# EAGLE board schematic-pcb (EAGLE 9.7.0)
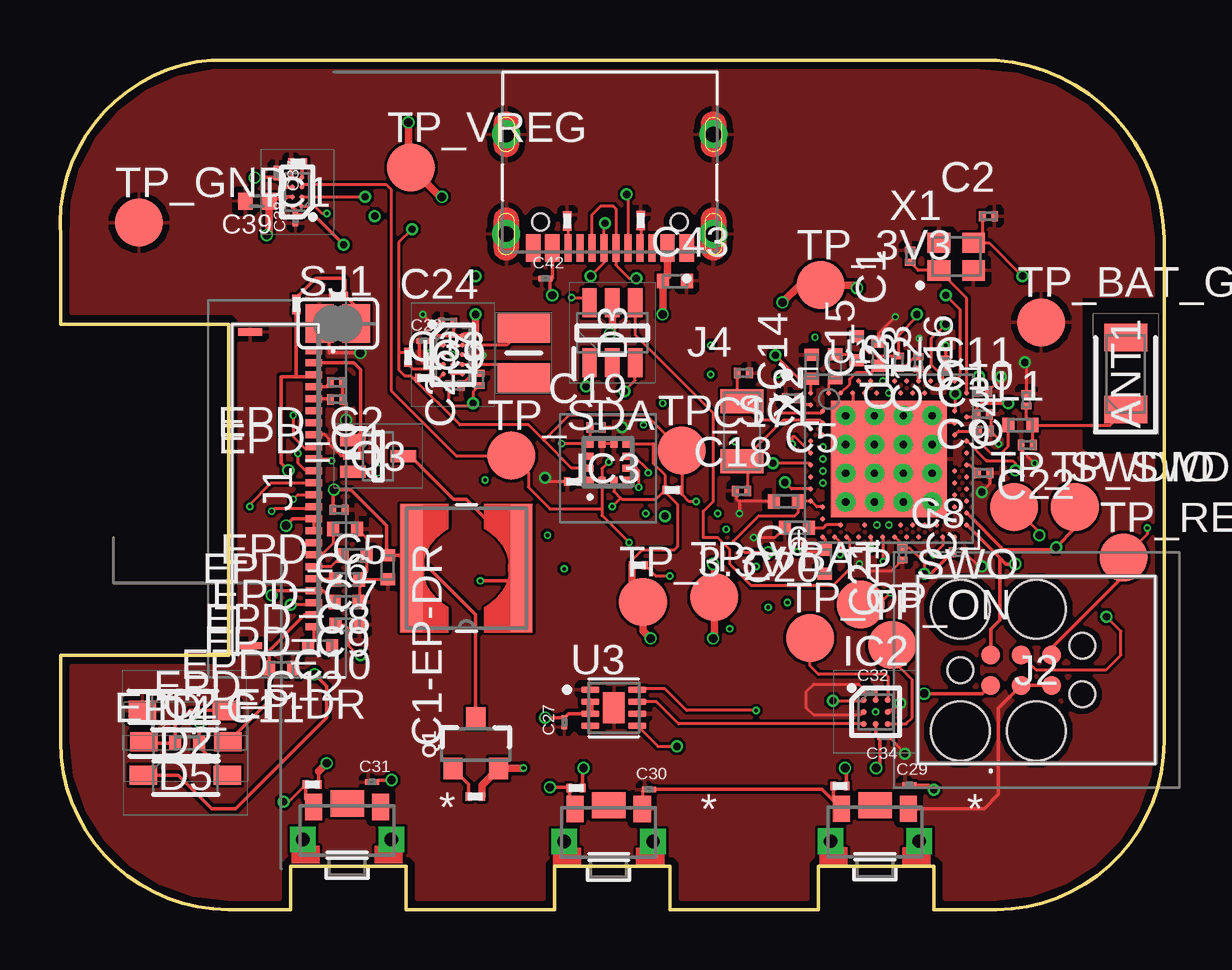
[diagram p0: board, top side]
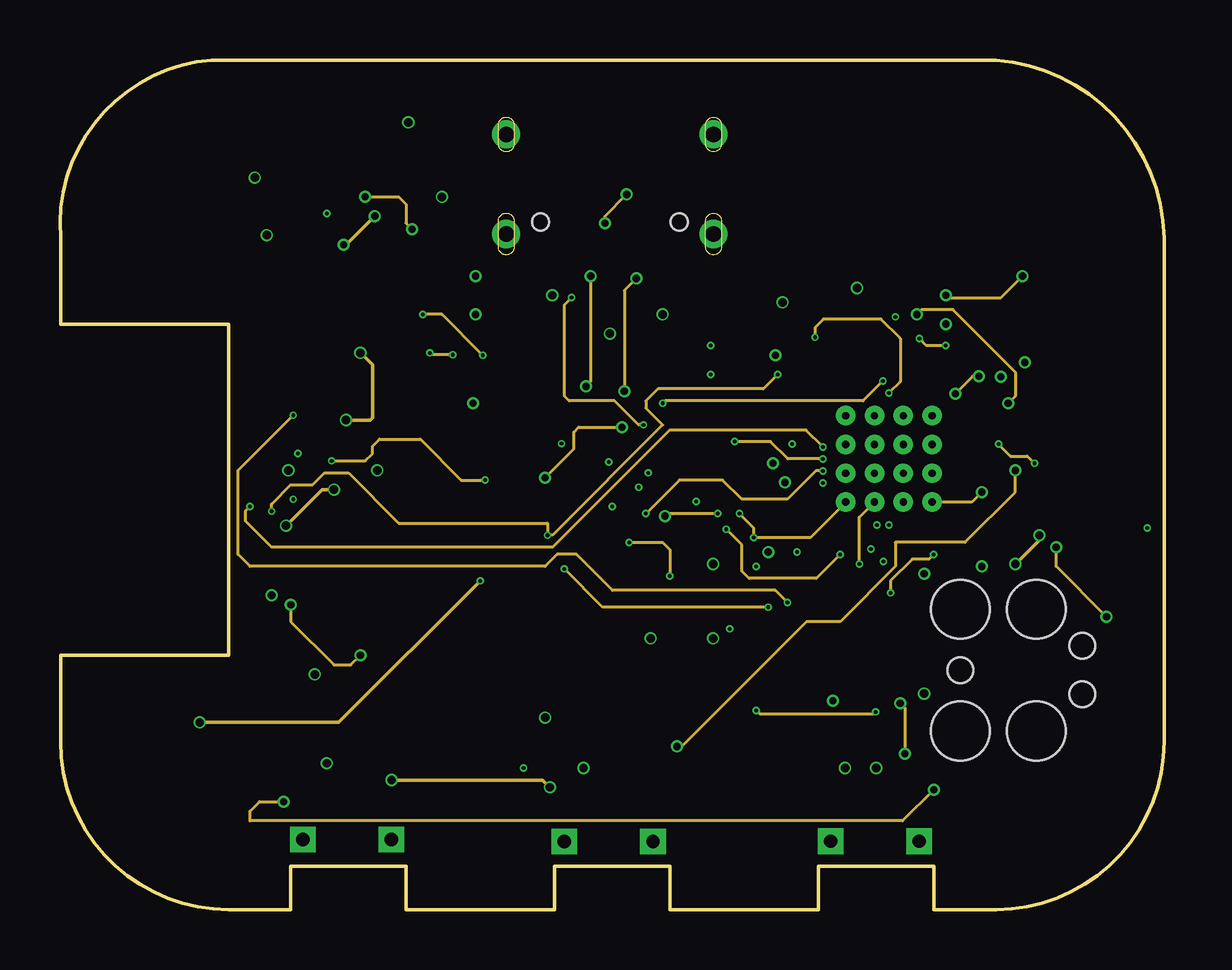
[diagram p1: board, inner layer Route2]
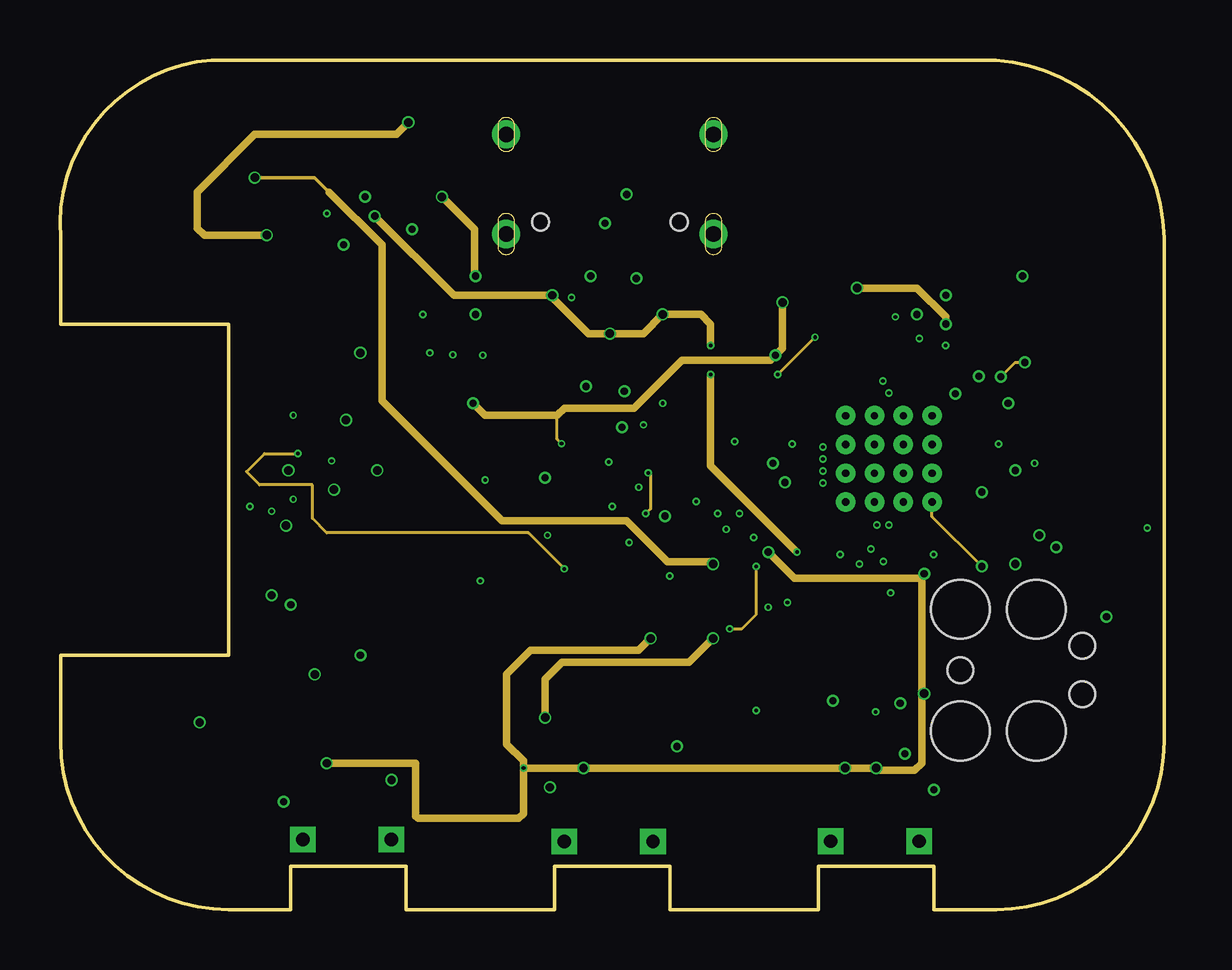
[diagram p2: board, inner layer Route63]
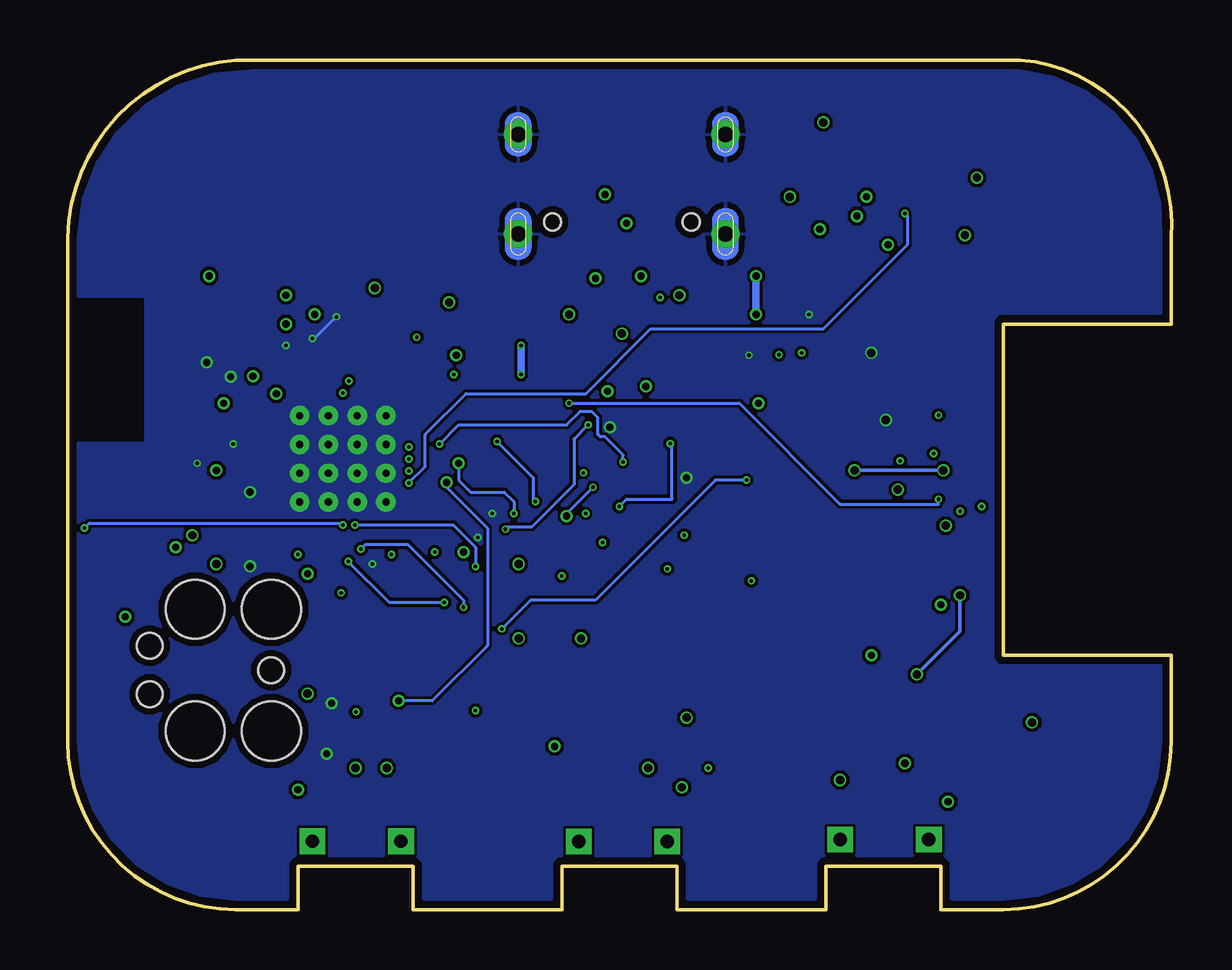
[diagram p3: board, bottom side, seen from below]

Size 46.02 x 35.4 mm. Coordinates in mm from the lower left corner, seen from the top.
Outline: 39.02,0 36.42,0 36.42,1.8 31.62,1.8 31.62,0 25.42,0 25.42,1.8 20.62,1.8 20.62,0 14.42,0 14.42,1.8 9.62,1.8 9.62,0 7.02,0 arc-90 0.02,7 0.02,10.6 7.02,10.6 7.02,24.4 0.02,24.4 0.02,28 arc-90 6.32,35.4 38.32,35.4 arc-90 46.02,28 46.02,7 arc-90 39.02,0
Copper layers (1*2*15+16): Top / Route2 / Route63 / Bottom
Stack-up 4 Layer Stack: Top SilkScreen Epoxy Ink / Top SolderMask SR:Green 0.0254mm Dk 4.3 / Top Surface Finish Lead-Free 0.02mm / Top CuFoil:007 0.035mm / Dielectric-1 Core:001 0.114mm / Dielectric-2 Prepreg:099 0.225mm / Route2 CuFoil:007 0.035mm / Dielectric-3 Core:001 0.114mm / Route63 CuFoil:007 0.035mm / Dielectric-4 Prepreg:099 0.225mm / Dielectric-5 Core:001 0.114mm / Bottom CuFoil:007 0.035mm / Bottom Surface Finish Lead-Free 0.02mm / Bottom SolderMask SR:Green 0.0254mm Dk 4.3 / Bottom SilkScreen Epoxy Ink
Design rules: minimum copper width 5mil, minimum drill size 0.15mm, copper clearance wire_polygon to wire_polygon 5mil, copper clearance wire_polygon to pad_smd 5mil, copper clearance wire_polygon to via 5mil, copper clearance pad_smd to pad_smd 5mil, copper clearance pad_smd to via 5mil, copper clearance via to via 5mil, copper clearance smd to pad (same net) 5mil, copper clearance smd to via (same net) 5mil, copper clearance smd to smd (same net) 5mil, dimension clearance 0.1mm, via restrict clearance 0mil, restrict clearance 0mil, drill distance 6mil, keepout clearance 0mil

## Footprints (pad centres in the part's own frame; a part is rotated, then mirrored left to right if it is on the bottom)
2450AT18B100E_ANTC3216X140N = smd 1.15 x 1.8: 1 -1.5,0; 2 1.5,0
NORDIC_NRF_3_RESC0201_L = smd 0.28 x 0.43: 1 -0.255,0; 2 0.255,0
NORDIC_NRF_3_RESC0402_L = smd 0.5 x 0.6: 1 -0.5,0; 2 0.5,0
GRM011R60J152KE01L_2_CAPC0201X13N = smd 0.22 x 0.23: 1 -0.185,0; 2 0.185,0
PERFECT_0402_0402 = smd 0.6 x 0.7: 1 -0.5,0; 2 0.5,0
ESP32_C6_LIBRARY_5_SOD3716X135N = smd 1.15 x 0.8: 1 -1.75,0; 2 1.75,0
ESP32_C6_LIBRARY_3_SOT95P280X145-6N = smd 1.2 x 0.6: 1 -1.25,0.95; 2 -1.25,0; 3 -1.25,-0.95; 4 1.25,-0.95; 5 1.25,0; 6 1.25,0.95
BQ25180YBGR_BGA8C40P2X4_100X155X50 = smd 0.2 x 0.2: A1 -0.2,0.6; A2 0.2,0.6; B1 -0.2,0.2; B2 0.2,0.2; C1 -0.2,-0.2; C2 0.2,-0.2; D1 -0.2,-0.6; D2 0.2,-0.6
DRV2605YZFR_BGA9C50P3X3_144X144X62 = smd 0.25 x 0.25: A1 -0.5,0.5; A2 0,0.5; A3 0.5,0.5; B1 -0.5,0; B2 0,0; B3 0.5,0; C1 -0.5,-0.5; C2 0,-0.5; C3 0.5,-0.5
BMA423_BMA423 = smd 0.3 x 0.35: 1 -0.75,-0.775; 2 -0.25,-0.775; 3 0.25,-0.775; 4 0.75,-0.775; 7 0.75,0.775; 8 0.25,0.775; 9 -0.25,0.775; 10 -0.75,0.775 | smd 0.35 x 0.3: 5 0.775,-0.25; 6 0.775,0.25; 11 -0.775,0.25; 12 -0.775,-0.25
RT6160AWSC_BGA15C40P3X5_140X230X60 = smd 0.216 x 0.216: A1 -0.4,0.8; A2 0,0.8; A3 0.4,0.8; B1 -0.4,0.4; B2 0,0.4; B3 0.4,0.4; C1 -0.4,0; C2 0,0; C3 0.4,0; D1 -0.4,-0.4; D2 0,-0.4; D3 0.4,-0.4; E1 -0.4,-0.8; E2 0,-0.8; E3 0.4,-0.8
503480-2400_5034802400 = smd 0.3 x 0.7: 1 -5.75,1.525; 2 -5.25,1.525; 3 -4.75,1.525; 4 -4.25,1.525; 5 -3.75,1.525; 6 -3.25,1.525; 7 -2.75,1.525; 8 -2.25,1.525; 9 -1.75,1.525; 10 -1.25,1.525; 11 -0.75,1.525; 12 -0.25,1.525; 13 0.25,1.525; 14 0.75,1.525; 15 1.25,1.525; 16 1.75,1.525; 17 2.25,1.525; 18 2.75,1.525; 19 3.25,1.525; 20 3.75,1.525; 21 4.25,1.525; 22 4.75,1.525; 23 5.25,1.525; 24 5.75,1.525 | smd 0.3 x 1: MP1 -6.54,-1.125; MP2 6.54,-1.125
TC2030-IDC_TC2030IDC = smd 0.783 x 0.783: 1 -0.953,-0.635; 2 -0.953,0.635; 3 0.317,-0.635; 4 0.317,0.635; 5 1.588,-0.635; 6 1.588,0.635 | hole 2.451: -2.223,-2.54; -2.223,2.54; 0.952,-2.54; 0.952,2.54 | hole 1.067: -2.223,0; 2.857,-1.016; 2.857,1.016
KH-TYPE-C-16P_KINGHELM_KH-TYPE-C-16P = smd 0.6 x 1.15: A1_B12 -3.2,4.725; A4_B9 -2.4,4.725; A9_B4 2.4,4.725; A12_B1 3.2,4.725 | smd 0.3 x 1.15: A5 -1.25,4.725; A6 -0.25,4.725; A7 0.25,4.725; A8 1.25,4.725; B5 1.75,4.725; B6 0.75,4.725; B7 -0.75,4.725; B8 -1.75,4.725 | drill 0.65 pad 1.05: SH1 -4.32,0; SH2 4.32,0; SH3 -4.32,4.15; SH4 4.32,4.15 | hole 0.7: -2.89,3.65; 2.89,3.65
NORDIC_NRF_2_RESC0402_L = smd 0.5 x 0.6: 1 -0.5,0; 2 0.5,0
ESP32_C6_LIBRARY_2_IND_4828-WE-TPC_WRE = smd 0.9 x 5.3: 1 -2.286,0; 2 2.286,0
MLP2016SR47MT0S1_INDC2016X100N = smd 1.2 x 2.2: 1 -1.028,0; 2 1.028,0
ESP32_C6_LIBRARY_4_ESP32_C6_LIBRARY_4_ESP32_C6_LIBRARY_4_ESP32_C6_LIBRARY_4_ESP32_WROVER_SPARKFUN-DISCRETESEMI_SOT23-3 = smd 0.8 x 0.9: 1 -0.95,-1; 2 0.95,-1; 3 0,1.1
ESP32_C6_LIBRARY_6_SOT65P210X110-3N = smd 1.05 x 0.5: 1 -1.05,0.65; 2 -1.05,-0.65; 3 1.05,0
CPF0201D7K68C1_0201 = smd 0.35 x 0.25: 1 0,0.275; 2 0,-0.275
ERA-1AEB3401C_0201 = smd 0.35 x 0.25: 1 0,0.275; 2 0,-0.275
ESP32_C6_LIBRARY_7_JUMPER_SJ = smd 1.168 x 1.6: 1 -0.762,0; 2 0.762,0
2025-10-22_07-23-44_LIBRARY_SW_EVP-AKE31A_PAN = smd 0.711 x 1.092: 1 -1.4,-0.972; 2 1.4,-0.972 | drill 0.559 pad 0.914 square: 3 -1.848,0.381; 4 1.848,0.381 | smd 1.397 x 1.092: 5 0,-1.124
HECTOR_WATCH_1_TP20R = smd 2 x 2: TP 0,0
NORDIC_NRF_4_AQFN50P700X700X85_HS-74N = smd 4.85 x 4.85: P$74 0,0 | drill 0.3 pad 0.6: P$75 -1.8,1.8; P$76 -0.6,1.8; P$77 0.6,1.8; P$78 1.8,1.8; P$79 -1.8,0.6; P$80 -0.6,0.6; P$81 0.6,0.6; P$82 1.8,0.6; P$83 -1.8,-0.6; P$84 -0.6,-0.6; P$85 0.6,-0.6; P$86 1.8,-0.6; P$87 -1.8,-1.8; P$88 -0.6,-1.8; P$89 0.6,-1.8; P$90 1.8,-1.8 | smd 0.2 x 0.2: P$A8 -1.25,3.25; P$A10 -0.75,3.25; P$A12 -0.25,3.25; P$A14 0.25,3.25; P$A16 0.75,3.25; P$A18 1.25,3.25; P$A20 1.75,3.25; P$A22 2.25,3.25; P$A23 2.75,3.25; P$AA24 3.25,-2.25; P$AB2 -2.75,-2.5; P$AC5 -2,-2.75; P$AC9 -1,-2.75; P$AC11 -0.5,-2.75; P$AC13 0,-2.75; P$AC15 0.5,-2.75; P$AC17 1,-2.75; P$AC19 1.5,-2.75; P$AC21 2,-2.75; P$AC24 3.25,-2.75; P$AD2 -2.75,-3.25; P$AD4 -2.25,-3.25; P$AD6 -1.75,-3.25; P$AD8 -1.25,-3.25; P$AD10 -0.75,-3.25; P$AD12 -0.25,-3.25; P$AD14 0.25,-3.25; P$AD16 0.75,-3.25; P$AD18 1.25,-3.25; P$AD20 1.75,-3.25; P$AD22 2.25,-3.25; P$AD23 2.75,-3.25; P$B1 -3.25,2.75; P$B3 -2.5,2.75; P$B5 -2,2.75; P$B7 -1.5,2.75; P$B9 -1,2.75; P$B11 -0.5,2.75; P$B13 0,2.75; P$B15 0.5,2.75; P$B17 1,2.75; P$B19 1.5,2.75; P$B24 3.25,2.75; P$C1 -3.25,2.25; P$D2 -2.75,2; P$D23 2.75,2; P$E24 3.25,1.75; P$F2 -2.75,1.5; P$F23 2.75,1.5; P$G1 -3.25,1.25; P$H2 -2.75,1; P$H23 2.75,1; P$J1 -3.25,0.75; P$J24 3.25,0.75; P$K2 -2.75,0.5; P$L1 -3.25,0.25; P$L24 3.25,0.25; P$M2 -2.75,0; P$N1 -3.25,-0.25; P$N24 3.25,-0.25; P$P2 -2.75,-0.5; P$P23 2.75,-0.5; P$R1 -3.25,-0.75; P$R24 3.25,-0.75; P$T2 -2.75,-1; P$T23 2.75,-1; P$U1 -3.25,-1.25; P$U24 3.25,-1.25; P$V23 2.75,-1.5; P$W1 -3.25,-1.75; P$W24 3.25,-1.75; P$Y2 -2.75,-2; P$Y23 2.75,-2
ESP32_C6_LIBRARY_SON50P200X200X80-9N = smd 0.76 x 0.27: 1 -0.985,0.75; 2 -0.985,0.25; 3 -0.985,-0.25; 4 -0.985,-0.75; 5 0.985,-0.75; 6 0.985,-0.25; 7 0.985,0.25; 8 0.985,0.75 | smd 0.9 x 1.3: 9 0,0
NORDIC_NRF_BT-XTAL_2016_N = smd 0.95 x 0.85: 1 -0.725,-0.575; 2 0.725,-0.575; 3 0.725,0.575; 4 -0.725,0.575
NORDIC_NRF_1_XTAL_3215_N = smd 1 x 1.8: 1 -1.25,0; 2 1.25,0

## Placement (x,y rotation side)
ANT1  2450AT18B100E  [2450AT18B100E_ANTC3216X140N]  44.42,22.33 90 top
C1  12pF  [NORDIC_NRF_3_RESC0201_L]  35.43,27.23 90 top
C1-EP-DR  10uF  [NORDIC_NRF_3_RESC0402_L]  13.66,14.26 270 top
C2  12pF  [NORDIC_NRF_3_RESC0201_L]  38.7,28.89 0 top
C2-EP-DR  4.7uF/25V  [NORDIC_NRF_3_RESC0402_L]  5.3,6.94 0 top
C3  1pF  [NORDIC_NRF_3_RESC0201_L]  38.54,19.94 0 top
C4  1pF  [NORDIC_NRF_3_RESC0201_L]  40.28,21.24 90 top
C5  100nF  [NORDIC_NRF_3_RESC0201_L]  30.49,21.31 180 top
C6  4.7µF  [NORDIC_NRF_3_RESC0402_L]  30.26,17.01 180 top
C7  100nF  [NORDIC_NRF_3_RESC0201_L]  35.11,14.82 270 top
C8  100nF  [NORDIC_NRF_3_RESC0201_L]  37.45,14.89 0 top
C9  820pF  [NORDIC_NRF_3_RESC0201_L]  38.5,18.19 0 top
C10  N.C.  [NORDIC_NRF_3_RESC0201_L]  38.48,20.64 0 top
C11  100pF  [NORDIC_NRF_3_RESC0201_L]  38.45,21.59 0 top
C12  100nF  [NORDIC_NRF_3_RESC0201_L]  36.93,22.68 90 top
C13  N.C.  [NORDIC_NRF_3_RESC0201_L]  35.78,22.78 90 top
C14  4.7µF  [NORDIC_NRF_3_RESC0402_L]  31.33,22.61 90 top
C15  1.0µF  [NORDIC_NRF_3_RESC0402_L]  34.13,23.16 90 top
C16  47nF  [NORDIC_NRF_3_RESC0201_L]  34.96,22.81 270 top
C17  12pF  [NORDIC_NRF_3_RESC0201_L]  28.48,22.36 180 top
C18  12pF  [NORDIC_NRF_3_RESC0201_L]  28.41,17.44 0 top
C19  100nF  [NORDIC_NRF_3_RESC0201_L]  22.35,20.09 0 top
C20  4.7µF  [NORDIC_NRF_3_RESC0402_L]  30.71,15.91 180 top
C21  4.7µF  [NORDIC_NRF_3_RESC0402_L]  31.88,14.49 270 top
C22  N.C.  [NORDIC_NRF_3_RESC0201_L]  40.32,19.36 180 top
C23  0.1uF  [GRM011R60J152KE01L_2_CAPC0201X13N]  15.16,23.7 0 top
C24  10uF  [NORDIC_NRF_3_RESC0201_L]  16.16,24.44 0 top
C25  22uF  [NORDIC_NRF_3_RESC0201_L]  17.48,22.09 90 top
C27  0.1uF  [GRM011R60J152KE01L_2_CAPC0201X13N]  21.02,7.8 90 top
C29  1uF  [GRM011R60J152KE01L_2_CAPC0201X13N]  35.4,5.2 0 top
C30  1uF  [GRM011R60J152KE01L_2_CAPC0201X13N]  24.55,5.01 0 top
C31  1uF  [GRM011R60J152KE01L_2_CAPC0201X13N]  13.01,5.31 0 top
C32  1uF  [GRM011R60J152KE01L_2_CAPC0201X13N]  33.77,9.11 0 top
C33  22uF  [NORDIC_NRF_3_RESC0201_L]  16.46,21.84 0 top
C34  0.1uF  [GRM011R60J152KE01L_2_CAPC0201X13N]  34.36,7.2 180 top
C37  1uF  [GRM011R60J152KE01L_2_CAPC0201X13N]  9.03,30.69 270 top
C38  1uF  [GRM011R60J152KE01L_2_CAPC0201X13N]  9.81,28.77 90 top
C39  10uF  [PERFECT_0402_0402]  8.22,29.52 180 top
C42  0.1uF  [GRM011R60J152KE01L_2_CAPC0201X13N]  20.24,26.3 0 top
C43  4.7uF  [NORDIC_NRF_3_RESC0402_L]  25.63,26.19 0 top
D2  MBR0530  [ESP32_C6_LIBRARY_5_SOD3716X135N]  5.25,7 0 top
D3  USBLC6-2SC6Y  [ESP32_C6_LIBRARY_3_SOT95P280X145-6N]  23.02,24.03 90 top
D4  MBR0530  [ESP32_C6_LIBRARY_5_SOD3716X135N]  5.19,8.3 0 top
D5  MBR0530  [ESP32_C6_LIBRARY_5_SOD3716X135N]  5.23,5.6 0 top
EPD_C1  1uF/50V  [NORDIC_NRF_3_RESC0201_L]  11.53,21.26 180 top
EPD_C2  1uF/50V  [NORDIC_NRF_3_RESC0201_L]  11.52,21.96 180 top
EPD_C5  0.1uF/50V  [NORDIC_NRF_3_RESC0201_L]  11.63,16.66 180 top
EPD_C6  1uF/50V  [NORDIC_NRF_3_RESC0402_L]  11.88,15.86 180 top
EPD_C7  1uF/50V  [NORDIC_NRF_3_RESC0402_L]  12.27,14.76 180 top
EPD_C8  1uF/50V  [NORDIC_NRF_3_RESC0402_L]  11.96,13.76 180 top
EPD_C9  1uF/50V  [NORDIC_NRF_3_RESC0402_L]  11.94,12.81 180 top
EPD_C10  1uF/50V  [NORDIC_NRF_3_RESC0402_L]  11.99,11.86 180 top
EPD_C11  1uF/50V  [NORDIC_NRF_3_RESC0402_L]  9.21,10.06 180 top
EPD_C12  1uF/50V  [NORDIC_NRF_3_RESC0402_L]  10.85,10.96 180 top
IC1  BQ25180YBGR_BQ25180YBGR  [BQ25180YBGR_BGA8C40P2X4_100X155X50]  9.89,29.9 180 top
IC2  DRV2605YZFR  [DRV2605YZFR_BGA9C50P3X3_144X144X62]  34,8.24 0 top
IC3  BMA421  [BMA423_BMA423]  22.84,18.64 0 top
IC9  RT6160AWSC  [RT6160AWSC_BGA15C40P3X5_140X230X60]  16.37,23.12 0 top
J1  503480-2400  [503480-2400_5034802400]  9.06,17.53 270 top
J2  TC2030-IDC  [TC2030-IDC_TC2030IDC]  39.75,9.98 0 top
J4  KH-TYPE-C-16P  [KH-TYPE-C-16P_KINGHELM_KH-TYPE-C-16P]  22.92,32.3 180 top
L1  3.9nH  [NORDIC_NRF_2_RESC0402_L]  40.03,20.19 0 top
L2  10µH  [NORDIC_NRF_2_RESC0402_L]  32.31,22.64 270 top
L3  15nH  [NORDIC_NRF_2_RESC0402_L]  33.21,23.39 270 top
L5  68uH  [ESP32_C6_LIBRARY_2_IND_4828-WE-TPC_WRE]  16.94,14.23 180 top
L7  FTC252012SR47MBCA  [MLP2016SR47MT0S1_INDC2016X100N]  19.33,23.19 270 top
Q1  20V/4.2A/52mΩ/1.4W  [ESP32_C6_LIBRARY_4_ESP32_C6_LIBRARY_4_ESP32_C6_LIBRARY_4_ESP32_C6_LIBRARY_4_ESP32_WROVER_SPARKFUN-DISCRETESEMI_SOT23-3]  17.33,6.88 0 top
Q3  SI1308EDL-T1-GE3  [ESP32_C6_LIBRARY_6_SOT65P210X110-3N]  13.26,18.9 0 top
R1_EP_ED  0.47  [CPF0201D7K68C1_0201]  9.85,25.21 0 top
R1_USB  5K1  [CPF0201D7K68C1_0201]  24.21,28.71 0 top
R2  0  [CPF0201D7K68C1_0201]  15.21,22.15 90 top
R2_EP_DR  10K  [CPF0201D7K68C1_0201]  12.21,18.91 90 top
R2_USB  5K1  [CPF0201D7K68C1_0201]  21.15,28.69 180 top
R3  0  [ERA-1AEB3401C_0201]  21.41,17.83 90 top
R4  0  [CPF0201D7K68C1_0201]  14.51,23.01 0 top
R5  10k  [ERA-1AEB3401C_0201]  32.51,5.15 90 top
R7  10k  [ERA-1AEB3401C_0201]  10.51,5.21 90 top
R8  10k  [ERA-1AEB3401C_0201]  21.51,5.07 90 top
R9  10K  [ERA-1AEB3401C_0201]  9.91,31.13 90 top
R17  3K3  [CPF0201D7K68C1_0201]  25.51,17.49 90 top
R18  3K3  [CPF0201D7K68C1_0201]  24.11,14.35 90 top
R_PWR_EPD  10K  [CPF0201D7K68C1_0201]  17.31,4.71 90 top
R_TYPE_SEL  2.2  [CPF0201D7K68C1_0201]  11.61,25.57 90 top
SJ1  N.C  [ESP32_C6_LIBRARY_7_JUMPER_SJ]  11.58,24.42 0 top
SW_DN  2025-10-22_07-23-44_LIBRARY_EVP-AKE31ASW_EVP-AKE31A_PAN  [2025-10-22_07-23-44_LIBRARY_SW_EVP-AKE31A_PAN]  11.97,3.3 180 top
SW_ENT  2025-10-22_07-23-44_LIBRARY_EVP-AKE31ASW_EVP-AKE31A_PAN  [2025-10-22_07-23-44_LIBRARY_SW_EVP-AKE31A_PAN]  22.87,3.22 180 top
SW_UP  2025-10-22_07-23-44_LIBRARY_EVP-AKE31ASW_EVP-AKE31A_PAN  [2025-10-22_07-23-44_LIBRARY_SW_EVP-AKE31A_PAN]  33.97,3.23 180 top
TP_3.3V  HECTOR_WATCH_1_TPTP20R  [HECTOR_WATCH_1_TP20R]  24.3,12.82 0 top
TP_3V3  HECTOR_WATCH_1_TPTP20R  [HECTOR_WATCH_1_TP20R]  31.7,26.02 0 top
TP_BAT_GND  HECTOR_WATCH_1_TPTP20R  [HECTOR_WATCH_1_TP20R]  40.9,24.47 0 top
TP_GND  HECTOR_WATCH_1_TPTP20R  [HECTOR_WATCH_1_TP20R]  3.29,28.62 0 top
TP_ON  HECTOR_WATCH_1_TPTP20R  [HECTOR_WATCH_1_TP20R]  34.68,11.02 0 top
TP_OP  HECTOR_WATCH_1_TPTP20R  [HECTOR_WATCH_1_TP20R]  31.26,11.32 0 top
TP_RESET  HECTOR_WATCH_1_TPTP20R  [HECTOR_WATCH_1_TP20R]  44.34,14.67 0 top
TP_SCL  HECTOR_WATCH_1_TPTP20R  [HECTOR_WATCH_1_TP20R]  25.92,19.12 0 top
TP_SDA  HECTOR_WATCH_1_TPTP20R  [HECTOR_WATCH_1_TP20R]  18.81,18.92 0 top
TP_SWDCLK  HECTOR_WATCH_1_TPTP20R  [HECTOR_WATCH_1_TP20R]  42.3,16.77 0 top
TP_SWDIO  HECTOR_WATCH_1_TPTP20R  [HECTOR_WATCH_1_TP20R]  39.77,16.77 0 top
TP_SWO  HECTOR_WATCH_1_TPTP20R  [HECTOR_WATCH_1_TP20R]  33.38,12.72 0 top
TP_VBAT  HECTOR_WATCH_1_TPTP20R  [HECTOR_WATCH_1_TP20R]  27.27,13.02 0 top
TP_VREG  HECTOR_WATCH_1_TPTP20R  [HECTOR_WATCH_1_TP20R]  14.63,30.92 0 top
U1  NRF52840_QF  [NORDIC_NRF_4_AQFN50P700X700X85_HS-74N]  34.55,18.78 0 top
U3  MAX17048G+T10  [ESP32_C6_LIBRARY_SON50P200X200X80-9N]  23.08,8.41 0 top
X1  32MHz  [NORDIC_NRF_BT-XTAL_2016_N]  37.36,27.21 0 top
X2  32.768kHz  [NORDIC_NRF_1_XTAL_3215_N]  28.43,19.93 270 top

## Library data of the parts
ANT1 = InkTime_v5; ARROW_PART_NUMBER: 2450AT18B100E; ARROW_PRICE-STOCK: https://www.arrow.com/en/products/2450at18b100e/johanson-dielectrics?utm_currency=USD&region=nac; DESCRIPTION: Antennas 2.45GHz ANTENNA; HEIGHT: 1.4mm; MANUFACTURER_NAME: JOHANSON TECHNOLOGY; MANUFACTURER_PART_NUMBER: 2450AT18B100E; MOUSER_PART_NUMBER: 609-2450AT18B100E; MOUSER_PRICE-STOCK: https://www.mouser.co.uk/ProductDetail/Johanson-Technology/2450AT18B100E?qs=yCnrNFeXz%252Bh5MFsFIXGZGA%3D%3D
C1 C1-EP-DR C2 C2-EP-DR C3-C22 C24 C25 C33 C39 C43 EPD_C1 EPD_C2 EPD_C5-EPD_C12 L1-L3 R1_EP_ED R1_USB R2 R2_EP_DR R2_USB R3-R5 R7-R9 R17 R18 R_PWR_EPD R_TYPE_SEL SJ1 TP_3.3V TP_3V3 TP_BAT_GND TP_GND TP_ON TP_OP TP_RESET TP_SCL TP_SDA TP_SWDCLK TP_SWDIO TP_SWO TP_VBAT TP_VREG U1 X1 X2 = InkTime_v5
C23 C27 C29-C32 C34 C37 C38 C42 = InkTime_v5; AVAILABILITY: In Stock; CHECK_PRICES: https://www.snapeda.com/parts/GRM011R60J152KE01L/Murata/view-part/?ref=eda; DESCRIPTION: SMD Capacitor X5R(EIA) with Capacitance: 1500pF Tol. 10%. Rated Voltage: 6.3Vdc; MF: Murata; MP: GRM011R60J152KE01L; PACKAGE: 0201 Murata; PRICE: None; SNAPEDA_LINK: https://www.snapeda.com/parts/GRM011R60J152KE01L/Murata/view-part/?ref=snap
D2 D4 D5 = InkTime_v5; AVAILABILITY: In Stock; CHECK_PRICES: https://www.snapeda.com/parts/MBR0530/Onsemi/view-part/?ref=eda; DESCRIPTION: Diode Schottky 30 V 500mA Surface Mount SOD-123; MF: ON Semiconductor; MP: MBR0530; PACKAGE: SOD-123-2 ON Semiconductor; PRICE: None; PURCHASE-URL: https://www.snapeda.com/api/url_track_click_mouser/?unipart_id=179458&manufacturer=ON Semiconductor&part_name=MBR0530&search_term=None; SNAPEDA_LINK: https://www.snapeda.com/parts/MBR0530/Onsemi/view-part/?ref=snap
D3 = InkTime_v5; AVAILABILITY: In Stock; CHECK_PRICES: https://www.snapeda.com/parts/USBLC6-2SC6Y/STMicroelectronics/view-part/?ref=eda; DESCRIPTION: 17V Clamp 5A (8/20µs) Ipp Tvs Diode Surface Mount SOT-23-6; MF: STMicroelectronics; MP: USBLC6-2SC6Y; PACKAGE: SOT-23-6 STMicroelectronics; PRICE: None; SNAPEDA_LINK: https://www.snapeda.com/parts/USBLC6-2SC6Y/STMicroelectronics/view-part/?ref=snap
IC1 = InkTime_v5; ARROW_PART_NUMBER: BQ25180YBGR; ARROW_PRICE-STOCK: https://www.arrow.com/en/products/bq25180ybgr/texas-instruments?utm_currency=USD&region=nac; DESCRIPTION: Charger IC Lithium Ion/Polymer, Lithium Iron Phosphate 8-DSBGA (1.6x1.1); HEIGHT: 0.5mm; MANUFACTURER_NAME: Texas Instruments; MANUFACTURER_PART_NUMBER: BQ25180YBGR; MOUSER_PART_NUMBER: 595-BQ25180YBGR; MOUSER_PRICE-STOCK: https://www.mouser.co.uk/ProductDetail/Texas-Instruments/BQ25180YBGR?qs=doiCPypUmgEWjAK%252BJAX6Tw%3D%3D
IC2 = InkTime_v5; ARROW_PART_NUMBER: DRV2605YZFR; ARROW_PRICE-STOCK: https://www.arrow.com/en/products/drv2605yzfr/texas-instruments?region=nac; DESCRIPTION: Haptic Driver for ERM/LRA with Built-In Library and Smart Loop Architecture; HEIGHT: 0.625mm; MANUFACTURER_NAME: Texas Instruments; MANUFACTURER_PART_NUMBER: DRV2605YZFR
IC3 = InkTime_v5; ARROW_PART_NUMBER: BMA423; ARROW_PRICE-STOCK: https://www.arrow.com/en/products/bma423/bosch; DESCRIPTION: Accelerometers Triaxial low-g 12bit Acceleration Sensor; HEIGHT: 1mm; MANUFACTURER_NAME: BOSCH; MANUFACTURER_PART_NUMBER: BMA423; MOUSER_PART_NUMBER: 262-BMA423; MOUSER_PRICE-STOCK: https://www.mouser.co.uk/ProductDetail/Bosch-Sensortec/BMA423?qs=HXFqYaX1Q2xC%252BSgeGoX3mg%3D%3D
IC9 = InkTime_v5; DESCRIPTION: Buck-Boost Regulator Positive Output Step-Up/Step-Down I2C DC-DC Controller IC 15-WL-CSP (BSC) (1.4x2.3); HEIGHT: 0.6mm; MANUFACTURER_NAME: RICHTEK; MANUFACTURER_PART_NUMBER: RT6160AWSC; MOUSER_PART_NUMBER: 835-RT6160AWSC; MOUSER_PRICE-STOCK: https://www.mouser.co.uk/ProductDetail/Richtek/RT6160AWSC?qs=amGC7iS6iy%2FLd9PSoixZXQ%3D%3D
J1 = InkTime_v5; DESCRIPTION: FFC & FPC Connectors 0.5mm FPC RA SMT Dual Contact 24Ckt; HEIGHT: 1.87mm; MANUFACTURER_NAME: Molex; MANUFACTURER_PART_NUMBER: 503480-2400; MOUSER_PART_NUMBER: 538-503480-2400; MOUSER_PRICE-STOCK: https://www.mouser.co.uk/ProductDetail/Molex/503480-2400?qs=OAhjpuo3Vu7efIoxFh9AOw%3D%3D
J2 = InkTime_v5; DESCRIPTION: CABLE ADAPTER 6 POS; HEIGHT: 19mm; MANUFACTURER_NAME: Tag Connect; MANUFACTURER_PART_NUMBER: TC2030-IDC
J4 = InkTime_v5; AVAILABILITY: Not in stock; CHECK_PRICES: https://www.snapeda.com/parts/KH-TYPE-C-16P/Kinghelm/view-part/?ref=eda; MF: kinghelm; MP: KH-TYPE-C-16P; PACKAGE: None; PRICE: None; SNAPEDA_LINK: https://www.snapeda.com/parts/KH-TYPE-C-16P/Kinghelm/view-part/?ref=snap
L5 = InkTime_v5; COPYRIGHT: Copyright (C) 2024 Ultra Librarian. All rights reserved.; MANUFACTURER_PART_NUMBER: 744043680; MFR_NAME: Wurth Electronics
L7 = InkTime_v5; DESCRIPTION: SMD / SMT Inductors (Coils), L=0.47?H, L x W x T :; HEIGHT: 1mm; JLCPCB: https://jlcpcb.com/partdetail/6763488-FTC252012SR47MBCA/C5832368; MANUFACTURER_NAME: TDK; MANUFACTURER_PART_NUMBER: FTC252012SR47MBCA
Q1 = InkTime_v5; PROD_ID: TRAN-14388
Q3 = InkTime_v5; AVAILABILITY: In Stock; CHECK_PRICES: https://www.snapeda.com/parts/SI1308EDL-T1-GE3/Vishay+Siliconix/view-part/?ref=eda; DESCRIPTION: Si1308EDL-T1-GE3 N-channel MOSFET Transistor, 1.5 A, 30 V, 3-Pin SC-70 | Siliconix / Vishay SI1308EDL-T1-GE3; MF: Vishay Siliconix; MP: SI1308EDL-T1-GE3; PACKAGE: SOT-323 Vishay Semiconductor; PRICE: None; PURCHASE-URL: https://www.snapeda.com/api/url_track_click_mouser/?unipart_id=274603&manufacturer=Vishay Siliconix&part_name=SI1308EDL-T1-GE3&search_term=None; SNAPEDA_LINK: https://www.snapeda.com/parts/SI1308EDL-T1-GE3/Vishay+Siliconix/view-part/?ref=snap
SW_DN SW_ENT SW_UP = InkTime_v5; COPYRIGHT: Copyright (C) 2025 Ultra Librarian. All rights reserved.; DIGI-KEY_PART_NUMBER_1: P123437TR-ND; DIGI-KEY_PART_NUMBER_2: P123437CT-ND; DIGI-KEY_PART_NUMBER_3: P123437DKR-ND; MANUFACTURER_NAME: Panasonic; MANUFACTURER_PART_NUMBER: EVP-AKE31A
U3 = InkTime_v5; AVAILABILITY: In Stock; CHECK_PRICES: https://www.snapeda.com/parts/MAX17048G+T10/Analog+Devices/view-part/?ref=eda; DESCRIPTION: 3µA 1-Cell/2-Cell Fuel Gauge with ModelGauge; MF: Analog Devices; MP: MAX17048G+T10; PACKAGE: TDFN-8 Maxim; PRICE: None; PURCHASE-URL: https://www.snapeda.com/api/url_track_click_mouser/?unipart_id=329239&manufacturer=Analog Devices&part_name=MAX17048G+T10&search_term=None; SNAPEDA_LINK: https://www.snapeda.com/parts/MAX17048G+T10/Analog+Devices/view-part/?ref=snap

## Nets
3V3: C6.1 C7.1 C8.1 C12.1 C14.1 C19.1 C25.1 C33.1 C34.2 IC2.C2 IC3.3 IC3.7 IC3.10 IC9.E2 IC9.E3 J2.1 Q1.2 R5.2 R7.2 R8.2 R17.1 R18.1 R_PWR_EPD.2 TP_3.3V.TP TP_3V3.TP U1.P$A22 U1.P$AD14 U1.P$AD23 U1.P$B1 U1.P$W1 U1.P$Y2
ALERT: U1.P$J24 U3.5
D+: D3.4 U1.P$AD6
D-: D3.6 U1.P$AD4
DEC1: C5.1 U1.P$C1
DEC3: C11.1 U1.P$D23
DEC4_6: C10.1 C15.1 C16.1 L3.1 U1.P$B5 U1.P$E24
DN: D3.1 J4.A7 J4.B7
DP: D3.3 J4.A6 J4.B6
EPD_3V3: C1-EP-DR.1 EPD_C5.2 J1.15 J1.16 L5.2 Q1.3
EPD_BUSY: J1.9 U1.P$AD12
EPD_CS: J1.12 U1.P$K2
EPD_DC: J1.11 U1.P$AD10
EPD_RST: J1.10 U1.P$AC11
GDR: J1.2 Q3.1 R2_EP_DR.2
GND: C1-EP-DR.2 C1.2 C2.2 C3.2 C4.2 C5.2 C6.2 C7.2 C8.2 C9.2 C10.2 C11.2 C12.2 C13.2 C14.2 C15.2 C16.2 C17.1 C18.1 C19.2 C20.2 C21.2 C22.2 C23.1 C24.1 C25.2 C27.1 C29.1 C30.1 C31.1 C32.1 C33.2 C34.1 C37.1 C38.1 C39.2 C42.1 C43.2 D3.2 D4.1 EPD_C1.1 EPD_C2.1 EPD_C5.1 EPD_C6.1 EPD_C7.1 EPD_C8.1 EPD_C9.1 EPD_C10.1 EPD_C11.1 EPD_C12.1 IC1.D2 IC2.B1 IC2.B3 IC3.8 IC3.9 IC9.C1 IC9.C3 J1.8 J1.17 J1.MP1 J1.MP2 J2.3 J2.5 J4.A1_B12 J4.A12_B1 J4.SH1 J4.SH2 J4.SH3 J4.SH4 R1_USB.1 R2_EP_DR.1 R2_USB.2 R3.1 R9.1 R_TYPE_SEL.1 SJ1.1 SW_DN.1 SW_ENT.1 SW_UP.1 TP_BAT_GND.TP TP_GND.TP U1.P$74 U1.P$75 U1.P$76 U1.P$77 U1.P$78 U1.P$79 U1.P$80 U1.P$81 U1.P$82 U1.P$83 U1.P$84 U1.P$85 U1.P$86 U1.P$87 U1.P$88 U1.P$89 U1.P$90 U1.P$B7 U1.P$F23 U3.1 U3.4 U3.6 U3.9 X1.2 X1.4
HAPTIC_EN: IC2.A1 U1.P$U1
IMU_INT1: IC3.5 U1.P$N1
IMU_INT2: IC3.6 U1.P$P2
LX1: IC9.B2 IC9.B3 L7.1
LX2: IC9.D2 IC9.D3 L7.2
MOSI: J1.14 U1.P$B13
N$1: IC9.B1 IC9.C2
N$2: C3.1 L1.1 U1.P$H23
N$3: C1.1 U1.P$B24 X1.1
N$4: C2.1 U1.P$A23 X1.3
N$5: C2-EP-DR.2 D5.2 L5.1 Q3.3
N$6: IC9.D1 R4.2
N$7: IC1.D1 R9.2
N$8: IC3.1 R3.2
N$9: IC9.E1 R2.2
N$10: L2.2 U1.P$B3
N$11: L2.1 L3.2
N$12: C20.1 U1.P$AC5
N$13: C2-EP-DR.1 D2.1 D4.2
N$15: C9.1 U1.P$N24
N$16: R1_EP_ED.1 R_TYPE_SEL.2 SJ1.2
N$17: EPD_C2.2 J1.4
N$18: C32.2 IC2.A2
N$19: EPD_C1.2 J1.5
N$20: EPD_C6.2 J1.18
N$21: EPD_C7.2 J1.19
N$22: EPD_C8.2 J1.20
N$24: C13.1 U1.P$A18
N$25: EPD_C10.2 J1.22
N$26: J4.A5 R1_USB.2
N$27: EPD_C12.2 J1.24
N$29: J4.B5 R2_USB.1
OUT+: IC2.A3 TP_OP.TP
OUT-: IC2.C3 TP_ON.TP
P0.00/XL1: C17.2 U1.P$D2 X2.1
P0.01/XL2: C18.2 U1.P$F2 X2.2
P0.04: U1.P$J1
P0.09: U1.P$L24
P0.13: U1.P$AD8
P0.13/1.5D: C30.2 R5.1 SW_UP.2
P0.14: U1.P$AC9
P0.14/1.5D: C31.2 R8.1 SW_ENT.2
P0.19: U1.P$AC15
P0.20: U1.P$AD16
P0.21: U1.P$AC17
P0.22: U1.P$AD18
P0.23: U1.P$AC19
P0.24: U1.P$AD20
P0.25: U1.P$AC21
P0.26: U1.P$G1
P0.27: U1.P$H2
P0.28: U1.P$B11
P0.29: U1.P$A10
P0.30: U1.P$B9
P0.31: U1.P$A8
P1.01: U1.P$Y23
P1.01/1.6C: Q1.1 R_PWR_EPD.1
P1.02: U1.P$W24
P1.02/1.6C: C29.2 R7.1 SW_DN.2
P1.03: U1.P$V23
P1.04: U1.P$U24
P1.05: U1.P$T23
P1.06: U1.P$R24
P1.07: U1.P$P23
P1.09: U1.P$R1
P1.10: U1.P$A20
P1.11: U1.P$B19
P1.12: U1.P$B17
P1.13: U1.P$A16
P1.14: U1.P$B15
P1.15: U1.P$A14
PMIC_INT: IC1.A1 U1.P$T2
PREVGH: D5.1 EPD_C9.2 J1.21
PREVGL: D2.2 EPD_C11.2 J1.23
RESE: J1.3 Q3.2 R1_EP_ED.2
RESET: J2.6 TP_RESET.TP U1.P$AC13
RF: ANT1.1 C4.1 C22.1 L1.2
SCK: J1.13 U1.P$A12
SCL/1.4C: IC2.C1 U3.7
SCL/2.4C: IC1.B1 IC3.12 R2.1 R4.1 R17.2 TP_SCL.TP U1.P$M2
SDA/1.4C: IC2.B2 U3.8
SDA/2.4C: IC1.C1 IC3.2 R18.2 TP_SDA.TP U1.P$L1
SWDCLK: J2.4 TP_SWDCLK.TP U1.P$AA24
SWDIO: J2.2 TP_SWDIO.TP U1.P$AC24
SWO: TP_SWO.TP U1.P$AD22
VBAT: C27.2 C37.2 IC1.C2 TP_VBAT.TP U3.2 U3.3
VBUS: C21.1 C38.2 C42.2 C43.1 D3.5 IC1.A2 J4.A4_B9 J4.A9_B4 U1.P$AD2
VREG: C23.2 C24.2 C39.1 IC1.B2 IC9.A1 IC9.A2 IC9.A3 TP_VREG.TP

## Tracks (layer width: path | path; a pad name or v marks a point on that pad's centre or on a via)
3V3  (via drill 0.15 pad 0.2, 0.3 pad 0.5, 0.35)
  Top 0.127: U1.P$A22 36.8,22.3 C12.1 36.6,22.43 36.32,22.7 36.32,23.8 v36.92,24.4 | U1.P$B1 31.3,22.08 C14.1 30.81,22.11 v29.82,23.1 | U1.P$Y2 31.55,16.78 U1.P$W1 30.78,17.03 C6.1 30.76,16.54 30.62,16.4 29.12,16.4 28.07,15.35 28.52,14.9 v29.52,14.9 | IC9.E3 IC9.E2 16.37,22.01 C33.1 16.21,21.12 16.32,21 17.12,21 v17.22,21.1 17.22,21.58 C25.1 | C19.1 IC3.10 v20.91,19.42 | IC3.3 23.09,17.43 23.37,17.15 | 23.37,17.15 23.42,17.1 24.85,17.1 R17.1 | R17.1 25.24,18.09 24.73,18.6 24.73,19.42 IC3.7 | R18.1 23.84,14.55 24.29,15 25.62,15 25.74,15.12 25.74,16.89 25.24,17.39 R17.1 | U1.P$AD14 35.11,15.22 C7.1 35.41,15.08 36.02,14.47 v36.02,14 | 23.37,17.15 v23.02,16.8
  Top 0.152: R8.2 21.79,5.87 v21.82,5.9 | R5.2 32.79,5.84 v32.72,5.9 | v34.02,5.9 34.18,6.05 C34.2 34,7.38 IC2.C2 | J2.1 38.45,9 v36.02,9 | U1.P$AD23 37.3,15 C8.1 36.31,14 v36.02,14 | R7.2 10.79,5.77
  Top 0.305: v24.62,11.3 24.3,11.62 TP_3.3V.TP 23.84,13.29 R18.1 | v33.22,25.9 33.1,26.02 TP_3V3.TP 30.84,26.02 v30.12,25.3 | 10.79,5.77 v11.12,6.1 | R_PWR_EPD.2 17.59,5.19 Q1.2 19.3,5.88 v19.32,5.9
  Route63 0.127: v20.91,19.42 20.72,19.6 20.72,20.6
  Route63 0.305: v24.62,11.3 24.12,10.8 19.62,10.8 18.62,9.8 18.62,6.9 19.32,6.2 v19.32,5.9 | v19.32,5.9 19.32,4 19.12,3.8 14.92,3.8 14.82,3.9 14.82,6.1 v11.12,6.1 | v19.32,5.9 v21.82,5.9 v32.72,5.9 v34.02,5.9 34.12,5.8 35.62,5.8 35.92,6.1 35.92,9.1 | 35.92,9.1 v36.02,9 | 35.92,9.1 35.92,13.9 v36.02,14 35.82,13.8 30.62,13.8 v29.52,14.9 | v33.22,25.9 35.72,25.9 36.92,24.7 v36.92,24.4 | v30.12,25.3 30.12,23.4 v29.82,23.1 29.62,22.9 25.92,22.9 23.92,20.9 21.02,20.9 20.72,20.6 17.72,20.6 v17.22,21.1
  Bottom 0.127: v23.02,16.8 22.72,17.1 20.82,17.1 20.82,19.33 v20.91,19.42
ALERT  (via drill 0.3 pad 0.5)
  Top 0.127: U3.5 24.93,6.8 v25.72,6.8 | U1.P$J24 38.62,18.71 38.62,18.7 39.72,18.7 39.82,18.6 v39.82,18.3
  Route2 0.127: v25.72,6.8 25.92,6.8 31.12,12 32.52,12 34.82,14.3 34.82,15.3 37.72,15.3 39.82,17.4 v39.82,18.3
D+
  Top 0.127: D3.4 23.97,23.95 27.22,20.7 27.22,17 26.82,16.6 26.82,15.5 27.42,15.5 27.92,15 27.92,14.4 28.82,13.5 32.22,13.5 32.9,14.18 32.9,15.43 U1.P$AD6
D-  (via drill 0.15 pad 0.2)
  Top 0.127: U1.P$AD4 32.52,15.31 v32.52,14.8 | v21.32,25.5 21.85,25.5 D3.6
  Route2 0.127: v32.52,14.8 31.52,13.8 28.72,13.8 28.42,14.1 28.42,15.2 v27.77,15.85 | v24.32,20.2 24.12,20.2 23.12,21.2 21.22,21.2 21.02,21.4 21.02,25.2 v21.32,25.5
  Bottom 0.127: v27.77,15.85 27.67,15.95 26.67,15.95 24.92,17.7 24.92,19.6 v24.32,20.2
DEC1
  Top 0.127: U1.P$C1 31.03,21.03 C5.1
DEC3  (via drill 0.3 pad 0.5)
  Top 0.127: U1.P$D23 37.32,20.8 v37.32,21.5 | v38.3,22.23 38.3,21.69 C11.1
  Route2 0.127: v37.32,21.5 38.05,22.23 v38.3,22.23
DEC4_6  (via drill 0.3 pad 0.5)
  Top 0.127: U1.P$E24 38.12,20.53 C10.1 38.23,20.91 38.42,21.1 v39.52,21.1 | U1.P$B5 32.92,21.9 32.92,22.1 33.18,22.36 33.83,22.36 C15.1 34.13,22.99 34.07,23.05 | L3.1 33.52,23.58 33.52,23.4 33.72,23.2 33.92,23.2 34.07,23.05 | 34.07,23.05 34.95,23.05 C16.1 34.96,23.94 35.72,24.7 v35.72,24.8
  Route2 0.127: v35.72,24.8 35.92,25 37.22,25 39.82,22.4 39.82,21.4 v39.52,21.1
DN  (via drill 0.3 pad 0.5)
  Top 0.127: v22.72,28.6 22.67,28.55 J4.A7 22.67,26.95 v22.12,26.4 | v23.62,29.8 23.67,29.75 J4.B7 | v21.92,21.8 21.92,22.63 D3.1
  Route2 0.127: v22.72,28.6 22.72,28.9 v23.62,29.8 | v22.12,26.4 22.12,22 v21.92,21.8
DP  (via drill 0.3 pad 0.5)
  Top 0.127: J4.B6 22.17,28.95 22.52,29.3 23.07,29.3 23.17,29.2 J4.A6 23.17,26.85 23.72,26.3 v24.02,26.3 | v23.52,21.6 23.97,22.05 D3.3
  Route2 0.127: v24.02,26.3 23.52,25.8 v23.52,21.6
EPD_3V3  (via drill 0.35)
  Top 0.152: J1.16 J1.15 9.7,16.28 v9.42,16 | EPD_C5.2 11.38,17.46 v11.42,17.5 12.12,17.5 13.62,16 13.62,14.76 C1-EP-DR.1 14.13,14.76 L5.2 15.39,14.23 17.33,12.29 Q1.3
  Route2 0.152: v9.42,16 10.92,17.5 v11.42,17.5
EPD_BUSY  (via drill 0.15 pad 0.2)
  Top 0.127: U1.P$AD12 34.3,14.52 v34.32,14.5 | v9.72,20.6 9.72,19.7 10.22,19.2 10.51,19.2
  Top 0.152: J1.9 10.51,19.2
  Route2 0.127: v30.32,12.8 29.82,13.3 23.02,13.3 21.52,14.8 20.72,14.8 20.22,14.3 7.92,14.3 7.42,14.8 7.42,18.3 v9.72,20.6
  Bottom 0.127: v34.32,14.5 32.62,12.8 v30.32,12.8
EPD_CS  (via drill 0.15 pad 0.2)
  Top 0.127: v7.92,16.8 7.92,16.9 8.8,17.78 J1.12
  Route2 0.127: U1.P$K2 31.1,19.98 25.42,19.98 20.54,15.1 8.82,15.1 7.72,16.2 7.72,16.6 v7.92,16.8
  other vias: 31.8,19.28
EPD_DC  (via drill 0.15 pad 0.2)
  Top 0.127: U1.P$AD10 v33.8,15.02 | J1.11 10.24,18.28 9.92,18.6 v9.92,19
  Route2 0.127: v29.52,12.6 22.62,12.6 v21.02,14.2
  Route63 0.127: v21.02,14.2 19.52,15.7 11.12,15.7 10.52,16.3 10.52,17.7 8.32,17.7 7.77,18.25 8.52,19 v9.92,19
  Bottom 0.127: v33.8,15.02 33.6,15.22 31.84,15.22 29.52,12.9 v29.52,12.6
EPD_RST  (via drill 0.15 pad 0.2)
  Top 0.127: J1.10 11.24,18.78 v11.32,18.7
  Route2 0.127: v11.32,18.7 12.72,18.7 13.02,19 13.02,19.3 13.32,19.6 15.02,19.6 16.72,17.9 v17.72,17.9
  Route63 0.127: v27.92,11.7 28.42,11.7 29.02,12.3 v29.02,14.3
  Bottom 0.127: U1.P$AC11 29.95,16.03 29.02,15.1 v29.02,14.3 | v17.72,17.9 19.02,17.9 24.02,12.9 26.72,12.9 v27.92,11.7
  other vias: 34.05,16.03
GDR
  Top 0.152: J1.2 12.24,22.78 12.52,22.5 12.52,19.86 Q3.1 12.49,19.28 R2_EP_DR.2
GND  (via drill 0.15 pad 0.2, 0.3 pad 0.5, 0.35)
  Top 0.127: C25.2 17.22,22.35 C33.2 | U1.P$F23 36.65,20.28 U1.P$78 | C10.2 38.8,20.58 C3.2 39.12,19.62 v39.12,19.4 | C11.2 39.22,22.11 v39.22,22.2 | v40.22,22.8 40.28,22.74 C4.2 | C9.2 38.76,17.73 v38.42,17.4 | C16.2 35.16,22.55 35.64,23.04 35.72,23.04 | 35.72,23.04 C13.2 | U1.P$B7 33.05,20.88 U1.P$75 | 12.61,12.81 EPD_C9.1 12.49,12.77 | EPD_C6.1 12.77,15.47 EPD_C7.1 12.77,14.05 EPD_C8.1 | 12.49,12.77 12.49,12.76 | EPD_C8.1 12.49,13.73 12.49,12.77 | EPD_C8.1 C1-EP-DR.2 | C8.2 38.3,14.3 v38.42,14.3 | IC3.8 IC3.9 | R3.1 20.39,17.83 v20.22,18 | C19.2 22.62,20.1 v23.42,20.1 | J4.SH3 26.67,27.58 J4.A1_B12 | IC2.B1 33.36,8.1 31.42,8.1 31.12,8.4 31.12,9.1 31.42,9.4 33.3,9.4 C32.1 | IC2.B3 34.56,8.3 34.72,8.3 v35.02,8.6 | v35.22,6.5 35.22,6.53 C34.1 | C7.2 34.65,14.1 33.52,14.1 33.32,14.3 v33.32,14.4 | C20.2 29.8,15.5 v28.92,15.5 | C6.2 28.32,17.01 | 28.32,17.01 28.29,17.01 28.22,17.08 28.22,17.38 C18.1 | 28.32,17.01 v28.32,16.5 | R2_EP_DR.1 11.71,18.91 11.22,19.4 11.22,19.6 11.02,19.8 10.61,19.8 | v40.62,18.6 40.07,19.16 C22.2 | C30.1 24.27,4.92 SW_ENT.1 | IC9.C1 15.87,23.12 15.55,22.8 15.12,22.8 14.98,22.95 C23.1 | IC9.C3 17.6,23.12 v17.62,23.1 | v15.12,24.8 15.48,24.44 C24.1 | C12.2 36.92,22.95 v36.92,23.5 | v35.82,23.8 35.82,23.14 35.72,23.04 | v34.82,24.7 34.13,24.01 C15.2 | U1.P$74 U1.P$84
  Top 0.152: IC1.D2 9.64,30.56 R9.1 | SJ1.1 11.22,24.02 11.22,23.2 v12.52,23.2 | EPD_C2.1 11.78,21.27 EPD_C1.1 11.92,21.12 v11.92,20.4 | J1.8 10.61,19.8 | J2.5 J2.3 39.12,8.4 39.12,4.8 38.52,4.2 SW_UP.1
  Route2 0.127: v38.42,17.4 38,16.98 U1.P$90 | v20.22,18 21.42,19.2 21.42,19.9 21.62,20.1 v23.42,20.1 | v35.02,8.6 35.22,8.4 v35.22,6.5 | v33.32,14.4 33.32,16.35 U1.P$88 | U1.P$87 31.27,15.5 v28.92,15.5 28.92,15.9 v28.32,16.5 | v39.12,19.4 39.62,18.9 40.32,18.9 v40.62,18.6 | v17.62,23.1 15.92,24.8 v15.12,24.8 | v36.92,23.5 36.12,23.5 v35.82,23.8
  Route2 0.152: v11.92,20.4 12.92,20.4 13.02,20.5 13.02,22.7 v12.52,23.2
  Route63 0.127: v39.22,22.2 39.82,22.8 v40.22,22.8 | v38.42,14.3 36.35,16.37 U1.P$90
  Bottom 0.127: U1.P$76 33.72,20.81 | v35.82,23.8 35.72,23.8 v34.82,24.7
  pour Top: -11.08,49.6 61.72,49.6 61.72,-3.2 -11.08,-3.2
  pour Bottom: -11.58,-4.9 61.52,-4.9 61.52,49.4 -11.58,49.4
HAPTIC_EN  (via drill 0.3 pad 0.5)
  Top 0.127: U1.P$U1 30.49,17.53 v30.22,17.8 | v32.22,8.7 33.46,8.7 IC2.A1
  Bottom 0.127: v30.22,17.8 30.22,17.6 28.52,15.9 28.52,11 30.82,8.7 v32.22,8.7
IMU_INT1  (via drill 0.15 pad 0.2, 0.3 pad 0.5)
  Top 0.127: U1.P$N1 31.23,18.6 v29.72,18.6 | IC3.5 24.03,18.39 24.12,18.3 v24.12,17.6
  Route2 0.127: v27.42,16.5 25.32,16.5 v25.22,16.4
  Bottom 0.127: v24.12,17.6 25.22,16.5 v25.22,16.4 | v29.72,18.6 29.72,17.9 29.22,17.4 27.82,17.4 27.42,17 v27.42,16.5
IMU_INT2  (via drill 0.15 pad 0.2)
  Top 0.127: v24.52,18.2 24.52,18.3 23.93,18.89 IC3.6
  Route2 0.127: U1.P$P2 31.5,18.28 30.32,17.1 28.42,17.1 27.62,17.9 25.82,17.9 v24.42,16.5
  Route63 0.127: v24.42,16.5 24.62,16.7 24.62,18.1 v24.52,18.2
  other vias: 31.8,18.28
LX1
  Top 0.127: IC9.B2 IC9.B3 18.63,23.52 L7.1
LX2
  Top 0.127: IC9.D2 IC9.D3 18.77,22.72 L7.2
MOSI  (via drill 0.15 pad 0.2)
  Top 0.127: J1.14 10.29,16.78 10.21,16.7 8.92,16.7 v8.82,16.6
  Route2 0.127: v8.82,16.6 8.82,16.9 9.62,17.7 10.52,17.7 11.02,18.2 12.02,18.2 14.12,16.1 20.32,16.1 v20.32,15.6 20.52,15.6 25.12,20.2 24.42,20.9 24.42,21.2 24.92,21.7 29.32,21.7 v29.92,22.3 | v31.47,23.85 31.47,24.25 31.82,24.6 34.22,24.6 35.02,23.8 35.02,22 U1.P$B13
  Route63 0.127: v31.47,23.85 v29.92,22.3
  other vias: 34.55,21.53
N$1  (via drill 0.15 pad 0.2)
  Top 0.127: v15.42,23.2 15.74,23.52 IC9.B1
  Route2 0.127: IC9.C2 15.5,23.12 v15.42,23.2
  other vias: 16.37,23.12
N$2
  Top 0.127: U1.P$H23 37.46,19.94 C3.1 38.29,19.54 38.82,19 39.22,19 39.53,19.31 L1.1
N$3
  Top 0.127: U1.P$B24 37.8,25.47 X1.1 35.77,26.64 C1.1
N$4  (via drill 0.3 pad 0.5)
  Top 0.127: C2.1 38.45,28.14 X1.3 38.74,27.78 v40.12,26.4 | U1.P$A23 37.52,22.25 37.52,25 v36.92,25.6
  Route2 0.127: v36.92,25.6 37.02,25.5 39.22,25.5 v40.12,26.4
N$5  (via drill 0.15 pad 0.2, 0.35)
  Top 0.152: D5.2 5.8,6.78 C2-EP-DR.2 5.8,7.78 v5.82,7.8 | Q3.3 14.61,18.9 16.41,17.1 16.92,17.1 19.23,14.79 L5.1 18.7,13.7 v17.52,13.7
  Route2 0.152: v17.52,13.7 11.62,7.8 v5.82,7.8
N$6
  Top 0.127: IC9.D1 15.87,22.72 15.67,22.52 14.73,22.52 R4.2
N$7
  Top 0.152: IC1.D1 10.09,31.03 R9.2
N$8
  Top 0.127: IC3.1 22.06,17.83 R3.2
N$9
  Top 0.127: IC9.E1 15.8,22.15 R2.2
N$10
  Top 0.127: U1.P$B3 32.05,21.88 L2.2
N$11
  Top 0.127: L2.1 32.96,23.14 L3.2
N$12
  Top 0.127: U1.P$AC5 31.95,16.03 31.82,15.9 C20.1
N$13
  Top 0.152: D2.1 3.56,6.94 C2-EP-DR.1 4.8,7.68 5.42,8.3 D4.2
N$15
  Top 0.127: U1.P$N24 37.91,18.53 C9.1
N$16
  Top 0.152: SJ1.2 12.34,25.11 R_TYPE_SEL.2 11.89,26.23 11.82,26.3 10.67,26.3 R1_EP_ED.1
N$17
  Top 0.152: EPD_C2.2 11.09,21.78 J1.4
N$18
  Top 0.127: C32.2 34,9.07 IC2.A2
N$19
  Top 0.152: J1.5 11.26,21.28 EPD_C1.2
N$20
  Top 0.127: EPD_C6.2 11.38,15.26 10.9,14.78 J1.18
N$21
  Top 0.127: EPD_C7.2 11.29,14.28 J1.19
N$22
  Top 0.127: J1.20 11.44,13.78 EPD_C8.2
N$24
  Top 0.127: U1.P$A18 35.78,22.05 C13.1
N$25  (via drill 0.3 pad 0.5)
  Top 0.127: J1.22 10.51,12.7 v9.62,12.7 | EPD_C10.2 11.86,11.86 12.02,11.7 12.02,11 12.47,10.55 v12.52,10.6
  Route2 0.127: v9.62,12.7 9.62,12 11.42,10.2 12.12,10.2 v12.52,10.6
N$26
  Top 0.127: R1_USB.2 24.21,27.62 J4.A5
N$27
  Top 0.152: J1.24 10.59,11.2 EPD_C12.2
N$29
  Top 0.127: R2_USB.1 21.17,28.39 J4.B5
OUT+
  Top 0.127: IC2.A3 34.52,8.76 34.52,9.7 34.42,9.8 31.62,9.8 31.26,10.16 TP_OP.TP
OUT-
  Top 0.127: IC2.C3 35.26,7.74 35.52,8 35.52,9.58 34.68,10.42 TP_ON.TP
P0.00/XL1
  Top 0.127: U1.P$D2 31.7,20.68 30,20.68 29.72,20.4 29.21,20.4 X2.1 28.23,21.39 C17.2
P0.01/XL2
  Top 0.127: U1.P$F2 31.7,20.38 30.13,20.38 X2.2 28.67,18.45 C18.2
P0.13/1.5D
  Top 0.152: C30.2 31.76,5.01 32.24,4.54 | SW_UP.2 32.4,4.38 32.24,4.54 | R5.1 32.24,4.54
P0.14/1.5D  (via drill 0.35)
  Top 0.152: SW_ENT.2 21.24,4.43 R8.1 21.21,5.1 v20.42,5.1 | C31.2 13.29,5.4 v13.82,5.4
  Route2 0.152: v13.82,5.4 20.12,5.4 v20.42,5.1
P1.01/1.6C
  Top 0.152: Q1.1 17.04,5.23 R_PWR_EPD.1
P1.02/1.6C  (via drill 0.3 pad 0.5)
  Top 0.127: C29.2 36.22,5.2 v36.42,5 | v9.32,4.5 9.53,4.5 R7.1
  Top 0.152: SW_DN.2 10.24,4.61 R7.1
  Route2 0.127: v36.42,5 35.12,3.7 7.92,3.7 7.92,4.1 8.32,4.5 v9.32,4.5
PMIC_INT  (via drill 0.15 pad 0.2)
  Top 0.127: IC1.A1 10.62,29.3 10.92,29 v11.12,29
  Bottom 0.127: U1.P$T2 31.12,18.46 31.12,19.8 29.42,21.5 24.42,21.5 21.72,24.2 14.52,24.2 11.02,27.7 11.02,28.9 v11.12,29
  other vias: 31.8,17.78
PREVGH  (via drill 0.35)
  Top 0.152: D5.1 4.92,5.6 6.32,4.2 7.32,4.2 11.12,8 11.12,9.3 v10.62,9.8 | v8.82,13.1 9,13.28 J1.21 10.97,13.28 EPD_C9.2
  Bottom 0.152: v10.62,9.8 8.82,11.6 v8.82,13.1
PREVGL
  Top 0.152: J1.23 10.2,12.28 8.71,10.79 EPD_C11.2 8.71,8.71 D2.2
RESE  (via drill 0.35)
  Top 0.152: R1_EP_ED.2 9.85,22.27 9.92,22.2 | 9.92,22.2 9.22,22.2 9.22,18.6 v9.52,18.3 | 9.92,22.2 10.51,22.2 J1.3 | v13.22,18.3 13.17,18.25 Q3.2
  Bottom 0.152: v9.52,18.3 10.42,18.3 v13.22,18.3
RESET  (via drill 0.15 pad 0.2)
  Top 0.127: v45.32,15.9 45.32,15.65 TP_RESET.TP
  Top 0.152: TP_RESET.TP 44.34,13.92 41.34,10.92 J2.6
  Bottom 0.127: v45.32,15.9 45.12,16.1 34.62,16.1 U1.P$AC13
  other vias: 34.55,16.03
RF
  Top 0.127: L1.2 40.53,19.41 C22.1 | L1.2 40.28,20.44 C4.1 | L1.2 43.78,20.19 ANT1.1
SCK  (via drill 0.15 pad 0.2)
  Top 0.127: v9.72,17.1 9.9,17.28 J1.13
  Route2 0.127: U1.P$A12 33.47,21.2 25.22,21.2 v25.12,21.1
  Bottom 0.127: v25.12,21.1 18.02,21.1 13.82,16.9 9.72,16.9 v9.72,17.1
  other vias: 34.3,22.03
SCL/1.4C
  Top 0.127: IC2.C1 25.78,7.74 24.86,8.66 U3.7
SCL/2.4C  (via drill 0.15 pad 0.2, 0.3 pad 0.5)
  Top 0.127: 14.72,22.15 R2.1 | IC1.B1 v12.72,29.7 | v14.67,28.35 14.12,27.8 14.12,23.2 | 14.12,23.2 14.12,22.5 14.37,22.25 14.62,22.25 14.72,22.15 | IC3.12 21.33,18.39 20.17,19.55 | 20.17,19.55 19.52,20.2 16.67,20.2 14.72,22.15 | 25.92,17.62 25.92,17.3 26.22,17 v26.52,17 | 25.92,17.62 TP_SCL.TP 24.44,20.6 21.22,20.6 20.17,19.55 | 25.92,17.62 R17.2 | R4.1 14.43,23.2 14.12,23.2
  Route2 0.127: v12.72,29.7 14.12,29.7 14.42,29.4 14.42,28.6 v14.67,28.35 | U1.P$M2 30.34,18.78 29.62,19.5 v28.12,19.5
  Bottom 0.127: v28.12,19.5 26.62,18 26.62,17.1 v26.52,17
  other vias: 31.8,18.78
SDA/1.4C  (via drill 0.15 pad 0.2)
  Top 0.127: v29.02,8.3 26.12,8.3 25.22,9.2 24.11,9.2 U3.8
  Route2 0.127: IC2.B2 33.9,8.14 29.18,8.14 v29.02,8.3
  other vias: 34,8.24
SDA/2.4C  (via drill 0.15 pad 0.2)
  Top 0.127: IC1.C1 10.19,30.2 13.62,30.2 13.82,30 13.82,21.6 16.5,18.92 TP_SDA.TP 19.52,18.21 19.52,17.6 20.42,16.7 22.59,16.7 | U1.P$L1 30.63,19.7 30.52,19.7 v30.52,19.4 | v22.87,18.65 22.59,18.37 IC3.2 22.59,16.7 | 22.59,16.7 22.59,16.43 v23.72,15.3 | v25.42,13.9 24.84,13.9 R18.2
  Route2 0.127: v23.72,15.3 25.12,15.3 25.42,15 v25.42,13.9
  Bottom 0.127: v30.52,19.4 29.72,20.2 25.22,20.2 24.67,20.75 24.17,20.75 23.92,20.5 23.92,19.8 23.82,19.7 23.62,19.7 22.87,18.95 v22.87,18.65
SWDCLK  (via drill 0.3 pad 0.5)
  Top 0.127: J2.4 40.68,10 43.62,10 44.22,10.6 44.22,11.6 v43.62,12.2
  Top 0.152: U1.P$AA24 39.33,15 41.42,15 v41.52,15.1 42.3,15.88 TP_SWDCLK.TP
  Route2 0.127: v43.62,12.2 41.52,14.3 v41.52,15.1
SWDIO  (via drill 0.35)
  Top 0.127: TP_SWDIO.TP 40.82,15.72 v40.82,15.6
  Top 0.152: U1.P$AC24 39.18,14.66 | 39.18,14.66 39.43,14.4 v39.82,14.4 | J2.2 38.8,11.68 39.18,12.05 39.18,14.66
  Route2 0.152: v39.82,14.4 40.82,15.4 v40.82,15.6
SWO  (via drill 0.15 pad 0.2)
  Top 0.127: U1.P$AD22 36.8,15.18 v36.42,14.8 | TP_SWO.TP 34.14,12.72 v34.62,13.2
  Route2 0.127: v36.42,14.8 36.22,14.6 35.52,14.6 34.62,13.7 v34.62,13.2
VBAT  (via drill 0.35)
  Top 0.152: IC1.C2 9.44,30.1 C37.2 v8.13,30.51 v8.12,30.5 | U3.3 21.2,8.16 C27.2 20.24,7.98 v20.22,8
  Top 0.305: v27.22,11.3 27.27,11.35 TP_VBAT.TP 27.27,14.35 v27.22,14.4 | U3.2 U3.3
  Route63 0.152: v8.12,30.5 10.62,30.5 11.22,29.9
  Route63 0.305: v27.22,11.3 26.22,10.3 20.92,10.3 20.22,9.6 v20.22,8 | v27.22,14.4 27.12,14.5 25.32,14.5 23.62,16.2 18.42,16.2 13.42,21.2 13.42,27.7 11.22,29.9
VBUS  (via drill 0.15 pad 0.2, 0.3 pad 0.5, 0.35)
  Top 0.127: U1.P$AD2 31.88,15.45 C21.1 31.79,14.9 v30.72,14.9
  Top 0.152: J4.A9_B4 20.52,26.3 C42.2 20.43,25.7 v20.52,25.6 | IC1.A2 9.81,29.18 C38.2 10.57,28.95 v11.82,27.7
  Top 0.305: J4.A4_B9 25.32,26.38 C43.1 v25.13,24.81 v25.12,24.8 | D3.5 23.02,24.1 v22.92,24
  Route2 0.152: v13.12,28.9 11.92,27.7 v11.82,27.7
  Route63 0.305: v13.12,28.9 16.42,25.6 v20.52,25.6 20.52,25.5 22.02,24 v22.92,24 24.32,24 v25.12,24.8 26.72,24.8 27.12,24.4 v27.12,23.5 | v27.12,22.3 27.12,18.5 v30.72,14.9
  Bottom 0.305: v27.12,23.5 v27.12,22.3
VREG  (via drill 0.3 pad 0.5, 0.35)
  Top 0.152: IC1.B2 9.49,29.7 9.41,29.62 8.82,29.62 C39.1 | IC9.A2 IC9.A1 15.57,23.92 C23.2 | IC9.A2 IC9.A3 16.85,24 17.32,24 | C24.2 16.42,23.97 IC9.A2
  Top 0.305: v14.52,32.8 14.52,31.03 TP_VREG.TP 15.85,29.7 v15.92,29.7 | v8.62,28.1 8.72,28.2 C39.1 | v17.32,24.8 17.32,24
  Route63 0.305: v14.52,32.8 14.02,32.3 8.12,32.3 5.72,29.9 5.72,28.4 6.02,28.1 v8.62,28.1 | v15.92,29.7 17.27,28.35 17.27,26.45 v17.32,26.4
  Bottom 0.305: v17.32,26.4 v17.32,24.8
(copper drawn outside any net)
  shapes: Bottom area x1, Route2 area x1, Top area x3